# EAGLE board carrier v2.0 (EAGLE 9.1.1)
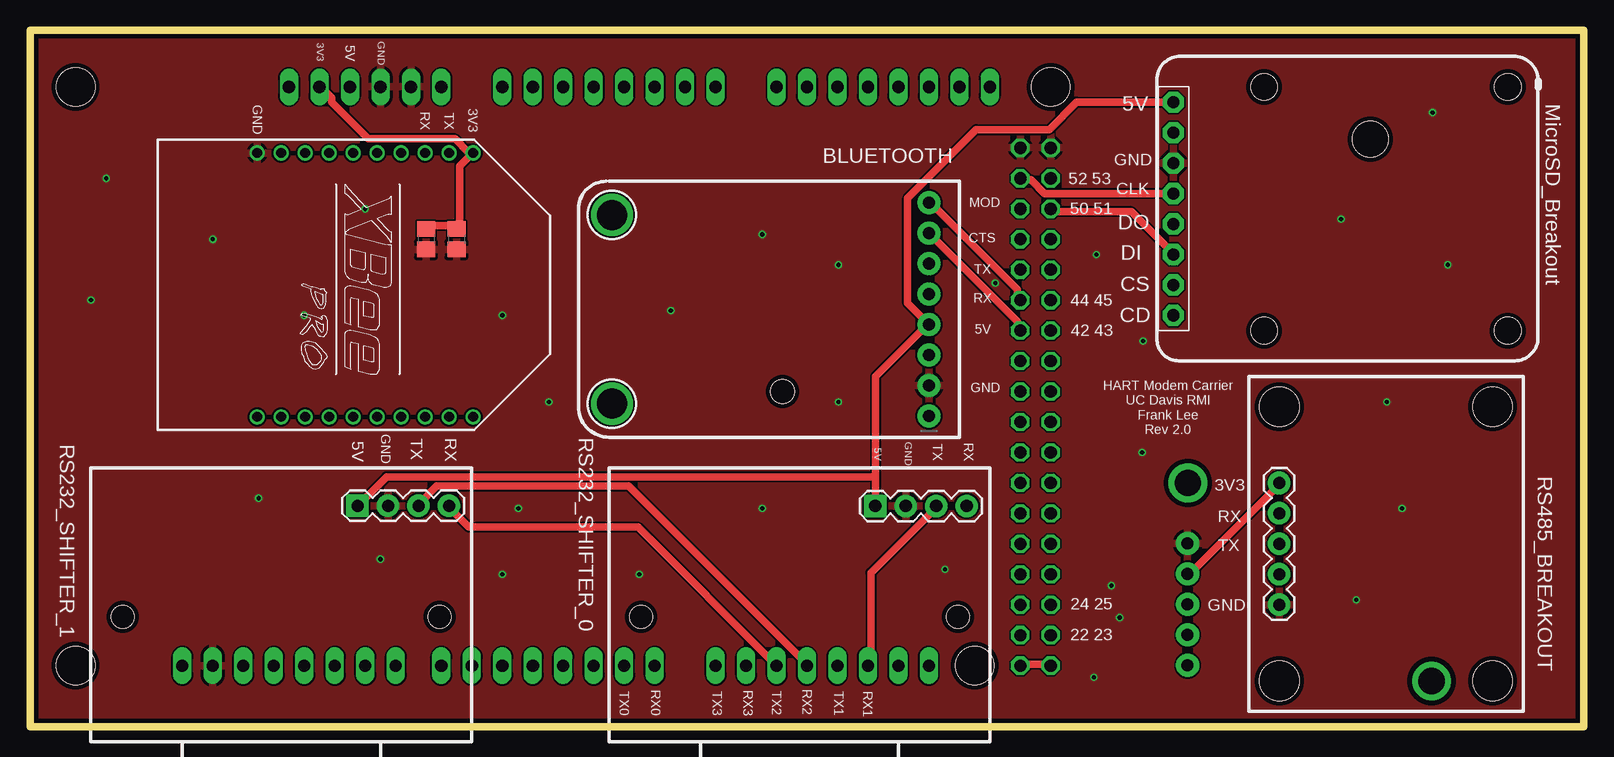
[diagram p0: board, top side]
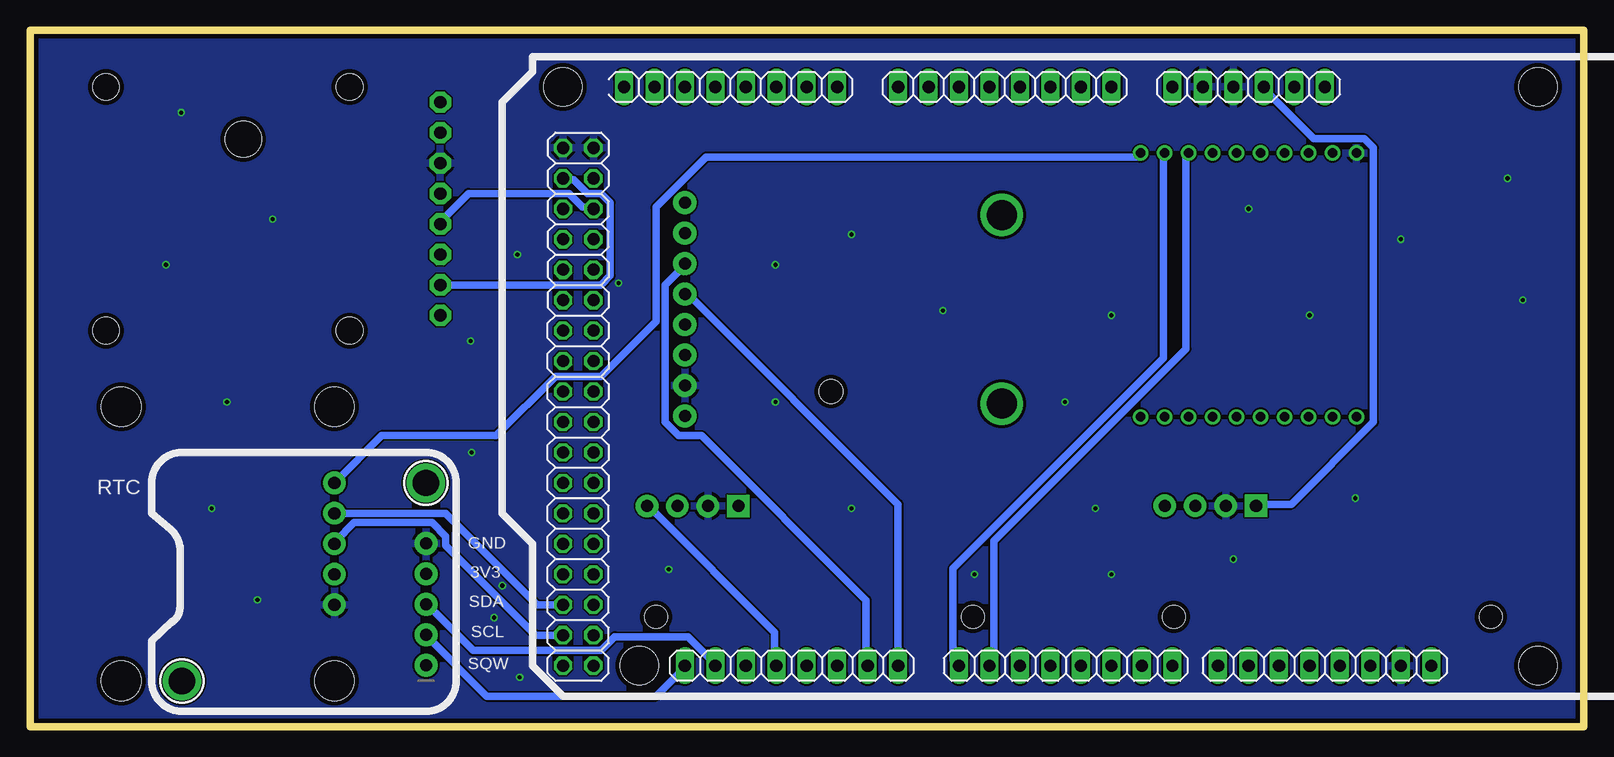
[diagram p1: board, bottom side, seen from below]

Size 129.52 x 58.09 mm. Coordinates in mm from the lower left corner, seen from the top.
Outline: 0,0 129.52,0 129.52,58.09 0,58.09 0,0
Copper layers (1*16): Top 0.035559375mm / dielectric 1.6mm / Bottom 0.035559375mm
Design rules "oshpark-2layer *": minimum track width 24mil, minimum drill 10mil, track to track 6mil, track to pad 6mil, pad to pad 6mil, via to via 6mil, smd to smd 6mil, copper to edge 15mil, drill to drill 6mil, minimum pad ring 5mil, minimum via ring 5mil, stop-mask expansion 2.5mil, vias tented up to drill 0mil, thermal gap 10mil
Net classes: 1 power: width 0.254 mm
Holes 1.91 mm at 7.75,9.14 34.16,9.14 50.93,9.14 77.34,9.14
Holes 2.21 mm at 123.19,53.34 123.19,33.02 102.87,33.02 102.87,53.34
Holes 3 mm at 111.73,49

## Footprints (pad centres in the part's own frame; a part is rotated, then mirrored left to right if it is on the bottom)
1X08_ROUND_76 = drill 1 pad 1.93: 1 -8.89,0; 2 -6.35,0; 3 -3.81,0; 4 -1.27,0; 5 1.27,0; 6 3.81,0; 7 6.35,0; 8 8.89,0
C0805 = smd 1.3 x 1.5: 1 -0.85,0; 2 0.85,0
MEGA_ARDUINO = drill 1.016 long: 1 33.02,2.54; 2 35.56,2.54; 3 38.1,2.54; 4 40.64,2.54; 5 43.18,2.54; 6 45.72,2.54; 7 50.8,2.54; 8 53.34,2.54; 9 55.88,2.54; 10 58.42,2.54; 11 60.96,2.54; 12 63.5,2.54; 13 66.04,2.54; 14 68.58,2.54; 15 73.66,2.54; 16 76.2,2.54; 17 78.74,2.54; 18 81.28,2.54; 19 83.82,2.54; 20 86.36,2.54; 21 88.9,2.54; 22 91.44,2.54; 23 86.36,50.8; 24 83.82,50.8; 25 81.28,50.8; 26 78.74,50.8; 27 76.2,50.8; 28 73.66,50.8; 29 71.12,50.8; 30 68.58,50.8; 31 63.5,50.8; 32 60.96,50.8; 33 58.42,50.8; 34 55.88,50.8; 35 53.34,50.8; 36 50.8,50.8; 37 48.26,50.8; 38 45.72,50.8; 39 41.91,50.8; 40 39.37,50.8; 41 36.83,50.8; 42 34.29,50.8; 43 31.75,50.8; 44 29.21,50.8; 45 26.67,50.8; 46 24.13,50.8 | drill 1.016 octagon: 47 93.98,50.8; 48 96.52,50.8; 49 93.98,48.26; 50 96.52,48.26; 51 93.98,45.72; 52 96.52,45.72; 53 93.98,43.18; 54 96.52,43.18; 55 93.98,40.64; 56 96.52,40.64; 57 93.98,38.1; 58 96.52,38.1; 59 93.98,35.56; 60 96.52,35.56; 61 93.98,33.02; 62 96.52,33.02; 63 93.98,30.48; 64 96.52,30.48; 65 93.98,27.94; 66 96.52,27.94; 67 93.98,25.4; 68 96.52,25.4; 69 93.98,22.86; 70 96.52,22.86; 71 93.98,20.32; 72 96.52,20.32; 73 93.98,17.78; 74 96.52,17.78; 75 93.98,15.24; 76 96.52,15.24; 77 93.98,12.7; 78 96.52,12.7; 79 93.98,10.16; 80 96.52,10.16; 81 93.98,7.62; 82 96.52,7.62 | hole 3.2: 15.24,50.8; 15.24,2.54; 90.17,50.8; 96.52,2.54 | hole 2: 74.168,27.94
STAND-OFF = hole 3.302: 0,0
1X08-BIG = drill 1.016 pad 1.778 octagon: 1 -8.89,0; 2 -6.35,0; 3 -3.81,0; 4 -1.27,0; 5 1.27,0; 6 3.81,0; 7 6.35,0; 8 8.89,0
1X04 = drill 1.016 pad 1.88 square: 1 0,0 | drill 1.016 pad 1.88: 2 2.54,0; 3 5.08,0; 4 7.62,0
1X05 = drill 1.016 pad 1.88: 1 0,0; 2 2.54,0; 3 5.08,0; 4 7.62,0; 5 10.16,0
1X05_ROUND_76 = drill 1 pad 1.93: 1 -5.08,0; 2 -2.54,0; 3 0,0; 4 2.54,0; 5 5.08,0
MOUNTINGHOLE_2.0_PLATED = drill 2.2 pad 3: P$1 0,0
MOUNTINGHOLE_2.5_PLATED = drill 2.5 pad 3.2: P$1 0,0
XBEE-PRO = drill 0.8 pad 1.27: 1 -11,9; 2 -11,7; 3 -11,5; 4 -11,3; 5 -11,1; 6 -11,-1; 7 -11,-3; 8 -11,-5; 9 -11,-7; 10 -11,-9; 11 11,-9; 12 11,-7; 13 11,-5; 14 11,-3; 15 11,-1; 16 11,1; 17 11,3; 18 11,5; 19 11,7; 20 11,9

## Placement (x,y rotation side)
BLUETOOTH  [1X08_ROUND_76]  74.93,34.8 90 top
C18  1uF  [C0805]  33.02,40.64 270 top
C19  8.3pF  [C0805]  35.56,40.64 270 top
IC1  [MEGA_ARDUINO]  -11.43,55.88 180 bottom
JP6  STAND-OFF  [STAND-OFF]  104.14,3.81 0 top
JP7  STAND-OFF  [STAND-OFF]  121.92,26.67 0 top
JP8  STAND-OFF  [STAND-OFF]  121.92,3.81 0 top
JP15  STAND-OFF  [STAND-OFF]  104.14,26.67 0 top
MICROSD_BREAKOUT  [1X08-BIG]  95.31,43.18 270 top
RS232_SHIFTER_0  [1X04]  70.46,18.4 0 top
RS232_SHIFTER_1  [1X04]  27.3,18.41 0 top
RS485_BREAKOUT  [1X05]  104.14,20.32 270 top
RTC  [1X05_ROUND_76]  96.49,10.19 90 bottom
U$1  MOUNTINGHOLE2.0  [MOUNTINGHOLE_2.0_PLATED]  96.52,20.32 90 bottom
U$4  MOUNTINGHOLE2.0  [MOUNTINGHOLE_2.0_PLATED]  116.84,3.81 90 bottom
U$28  MOUNTINGHOLE2.5  [MOUNTINGHOLE_2.5_PLATED]  48.51,26.92 90 top
U$29  MOUNTINGHOLE2.5  [MOUNTINGHOLE_2.5_PLATED]  48.51,42.67 90 top
XB1  XBEE-PRO  [XBEE-PRO]  27.94,36.83 270 top

## Library data of the parts
BLUETOOTH RTC = microbuilder
C18 C19 = resistor
IC1 = arduino
JP6-JP8 JP15 RS485_BREAKOUT = SparkFun
MICROSD_BREAKOUT = adafruit
RS232_SHIFTER_0 RS232_SHIFTER_1 = SparkFun-Connectors
U$1 U$4 U$28 U$29 = microbuilder; BOM: EXCLUDE
XB1 = xbee; MPN: XBP24-AWI-001; OC_FARNELL: 1337916; OC_NEWARK: 42M2667

## Nets
232_RX_0: IC1.26 RS232_SHIFTER_0.4
232_RX_1: IC1.28 RS232_SHIFTER_1.4
232_TX_0: IC1.25 RS232_SHIFTER_0.3
232_TX_1: IC1.27 RS232_SHIFTER_1.3
+5V: IC1.47 IC1.48
+VIN: IC1.6
ARDUINO_3V3: C18.1 C19.1 IC1.2 RS485_BREAKOUT.1 RTC.4 XB1.1
ARDUINO_5V: BLUETOOTH.4 IC1.3 MICROSD_BREAKOUT.1 RS232_SHIFTER_0.1 RS232_SHIFTER_1.1
BLUETOOTH_CTS: BLUETOOTH.7 IC1.69
BLUETOOTH_MOD: BLUETOOTH.8 IC1.71
BLUETOOTH_RX: BLUETOOTH.5 IC1.30
BLUETOOTH_TX: BLUETOOTH.6 IC1.29
CD: MICROSD_BREAKOUT.8
CLK: IC1.79 MICROSD_BREAKOUT.4
CS: IC1.80 MICROSD_BREAKOUT.7
DI: IC1.78 MICROSD_BREAKOUT.6
DO: IC1.77 MICROSD_BREAKOUT.5
GND: BLUETOOTH.2 C18.2 C19.2 IC1.4 IC1.5 IC1.45 IC1.81 IC1.82 MICROSD_BREAKOUT.3 RS232_SHIFTER_0.2 RS232_SHIFTER_1.2 RS485_BREAKOUT.5 RTC.5 XB1.10
RS485_RX: IC1.52 RS485_BREAKOUT.2
RS485_TX: IC1.50 RS485_BREAKOUT.3
SCL: IC1.23 RTC.2
SDA: IC1.24 RTC.3
XBEE_RX: IC1.32 XB1.3
XBEE_TX: IC1.31 XB1.2

## Tracks (layer width: path | path; a pad name or v marks a point on that pad's centre or on a via)
232_RX_0
  Bottom 0.61: IC1.26 67.44,5.21 67.44,7.87 77.72,18.16 RS232_SHIFTER_0.4
232_RX_1
  Top 0.61: IC1.28 50.67,16.64 36.58,16.64 35.05,18.16 RS232_SHIFTER_1.4
232_TX_0
  Top 0.61: IC1.25 70.1,5.21 70.1,12.83 75.44,18.16 RS232_SHIFTER_0.3
232_TX_1
  Top 0.61: IC1.27 64.77,5.21 49.91,20.07 33.91,20.07 32.38,18.54 RS232_SHIFTER_1.3
+5V
  Top 0.61: IC1.47 82.68,5.21 84.96,5.21 IC1.48
ARDUINO_3V3
  Top 0.61: C18.1 33.15,41.78 35.43,41.78 C19.1 35.81,41.78 35.81,46.74 36.58,47.5 XB1.1 36.58,47.88 35.43,49.02 28.19,49.02 25.15,52.07 25.15,52.45 24.38,53.21 IC1.2 | RTC.4 96.77,12.83 104.01,20.07 RS485_BREAKOUT.1
  Bottom 0.61: RS485_BREAKOUT.1 100.2,24.26 90.68,24.26 85.72,29.21 81.91,29.21 77.34,33.78 77.34,43.31 73.15,47.5 36.96,47.5 XB1.1
ARDUINO_5V
  Top 0.61: MICROSD_BREAKOUT.1 95.25,52.07 87.25,52.07 84.96,49.78 78.87,49.78 73.15,44.07 73.15,35.31 BLUETOOTH.4 74.68,33.4 70.49,29.21 70.49,20.83 | 70.49,20.83 70.49,18.54 RS232_SHIFTER_0.1 | RS232_SHIFTER_1.1 29.72,20.83 70.49,20.83
  Bottom 0.61: IC1.3 26.67,53.21 22.48,49.02 18.29,49.02 17.53,48.26 17.53,25.4 24.38,18.54 27.05,18.54 RS232_SHIFTER_1.1
BLUETOOTH_CTS
  Top 0.61: BLUETOOTH.7 82.3,33.78 82.3,33.02 IC1.69
BLUETOOTH_MOD
  Top 0.61: IC1.71 82.3,35.69 82.3,36.45 75.06,43.69 BLUETOOTH.8
BLUETOOTH_RX
  Bottom 0.61: IC1.30 57.15,18.54 74.68,36.07 BLUETOOTH.5
BLUETOOTH_TX
  Bottom 0.61: IC1.29 59.82,5.21 59.82,10.54 73.53,24.26 75.44,24.26 76.58,25.4 76.58,36.83 75.06,38.35 BLUETOOTH.6
CLK
  Top 0.61: IC1.79 82.68,45.59 83.44,45.59 84.58,44.45 95.25,44.45 MICROSD_BREAKOUT.4
CS
  Bottom 0.61: IC1.80 84.96,45.59 84.2,45.59 83.06,44.45 81.91,44.45 81.15,43.69 81.15,37.59 81.91,36.83 95.25,36.83 MICROSD_BREAKOUT.7
DI
  Top 0.61: IC1.78 85.34,42.93 91.82,42.93 95.25,39.5 MICROSD_BREAKOUT.6
DO
  Bottom 0.61: IC1.77 82.68,43.31 83.44,43.31 84.58,44.45 92.96,44.45 95.25,42.16 MICROSD_BREAKOUT.5
GND  (via drill 0.35)
  other vias: 6.35,45.72 5.08,35.56 15.24,40.64 22.86,34.29 27.94,43.18 19.05,19.05 29.21,13.97 39.37,12.7 40.72,18.19 43.26,27.08 53.42,34.7 61.04,41.05 67.39,38.51 67.39,27.08 61.04,18.19 76.28,13.11 90.14,11.76 92.79,32.16 109.3,42.32 116.92,51.21 118.19,38.51 39.37,34.29 90.83,9.09 88.7,4.11 88.9,39.37 114.38,18.19 110.57,10.57 50.8,12.7 113.11,27.08 92.71,22.86 80.47,36.98
  pour Top: -36.83,92.71 158.75,92.71 158.75,-24.13 -36.83,-24.13
  pour Bottom: -30.48,78.74 151.13,78.74 151.13,-26.67 -30.48,-26.67
RS485_RX
  Bottom 0.61: IC1.52 85.34,10.16 87.25,10.16 94.87,17.78 104.01,17.78 RS485_BREAKOUT.2
RS485_TX
  Bottom 0.61: IC1.50 87.38,7.62 94.87,15.11 94.87,15.88 96.01,17.02 102.49,17.02 104.01,15.49 RS485_BREAKOUT.3
SCL
  Bottom 0.61: IC1.23 75.06,4.83 77.34,2.54 91.44,2.54 96.39,7.49 RTC.2
SDA
  Bottom 0.61: IC1.24 72.39,5.21 74.68,7.49 80.77,7.49 81.91,6.35 92.58,6.35 96.39,10.16 RTC.3
XBEE_RX
  Bottom 0.61: XB1.3 33.15,47.5 33.15,31.5 49.15,15.49 49.15,5.59 49.53,5.21 IC1.32
XBEE_TX
  Bottom 0.61: IC1.31 52.58,5.59 52.58,13.21 35.05,30.73 35.05,47.5 XB1.2

## Text on the board
tPlace: GND | 3V3 | 5V | GND | RX | TX | 3V3 | 5V | MicroSD_Breakout | BLUETOOTH | GND | 52 53 | CLK | MOD | 50 51 | DO | CTS | DI | TX | CS | RX | 44 45 | CD | 5V | 42 43 | GND | GND | TX | RX | RS232_SHIFTER_0 | HART Modem Carrier / UC Davis RMI / Frank Lee / Rev 2.0 | 5V | 5V | GND | TX | RX | 3V3 | RX | TX | 24 25 | GND | 22 23 | RX0 | RX3 | RX2 | TX0 | TX3 | TX2 | TX1 | RX1
bPlace: RTC | GND | 3V3 | SDA | SCL | SQW